# Altium PCB Reflow.PcbDoc
Units mm, origin at the board's own origin, x right, y up, seen from the top; angles counter-clockwise.
Board outline 100.73 x 61 mm, 2 copper layers (Top Layer, Bottom Layer), stack 1.569 mm thick; 44 components, 35 nets, 172 pads, 133 vias.
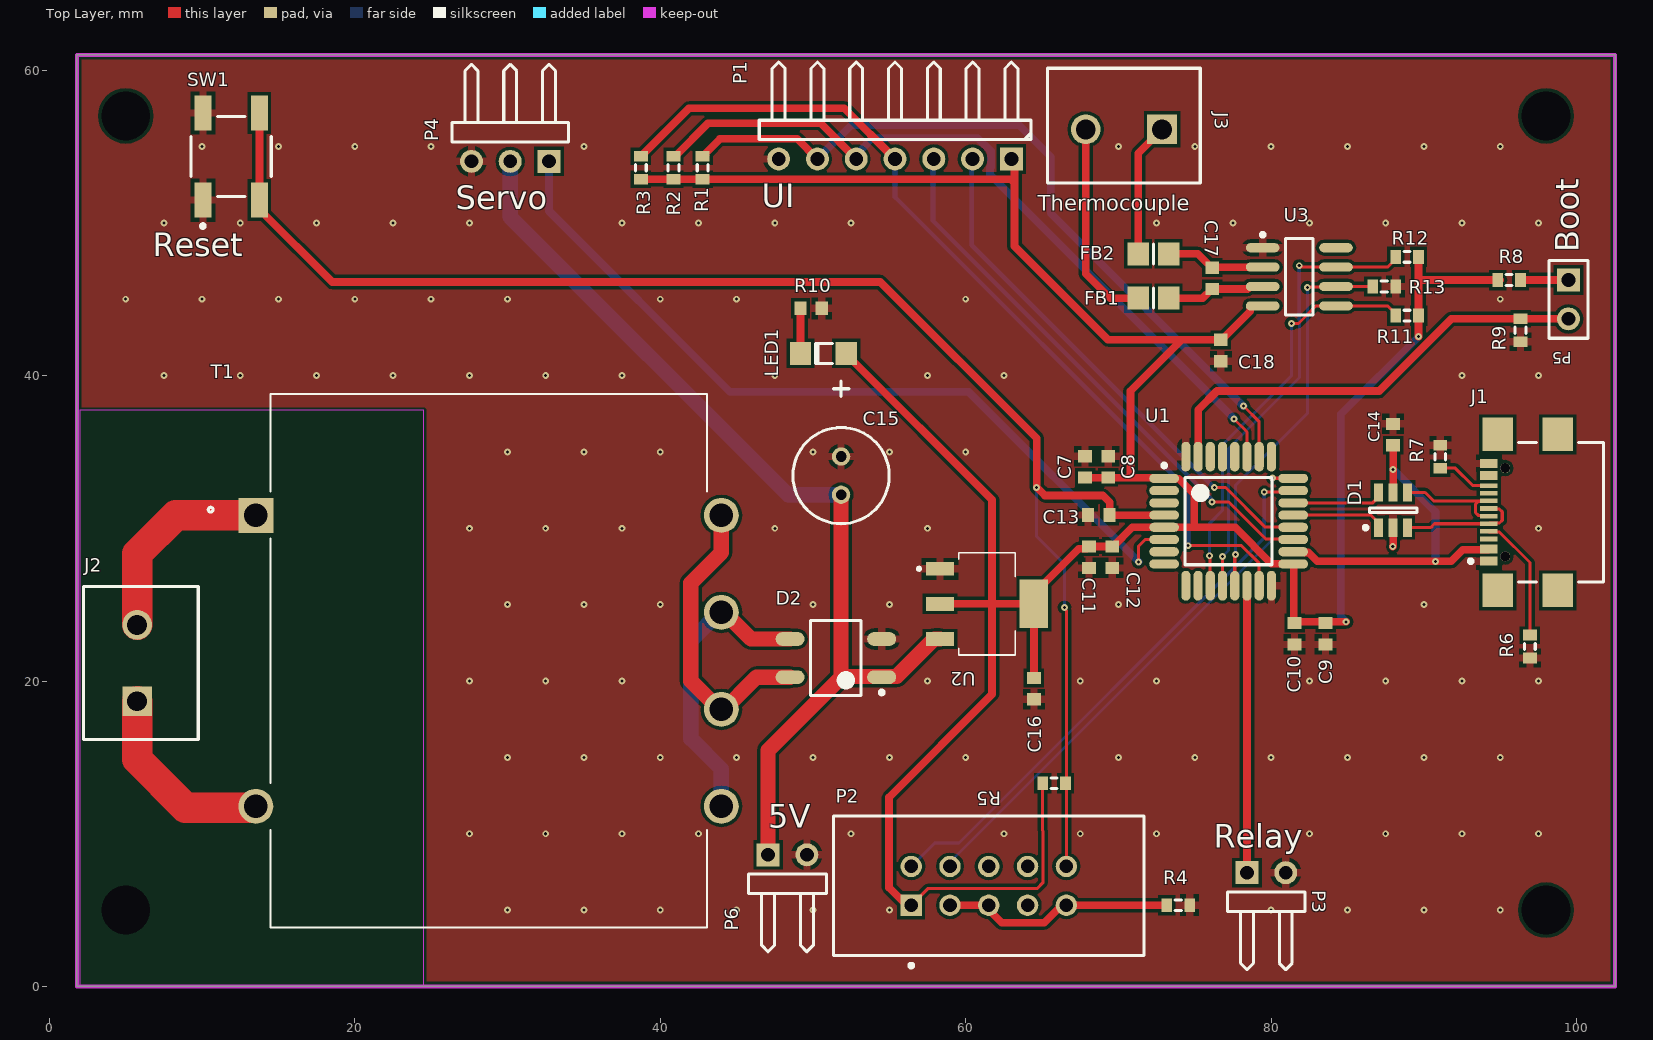
[diagram p0: Top Layer view]
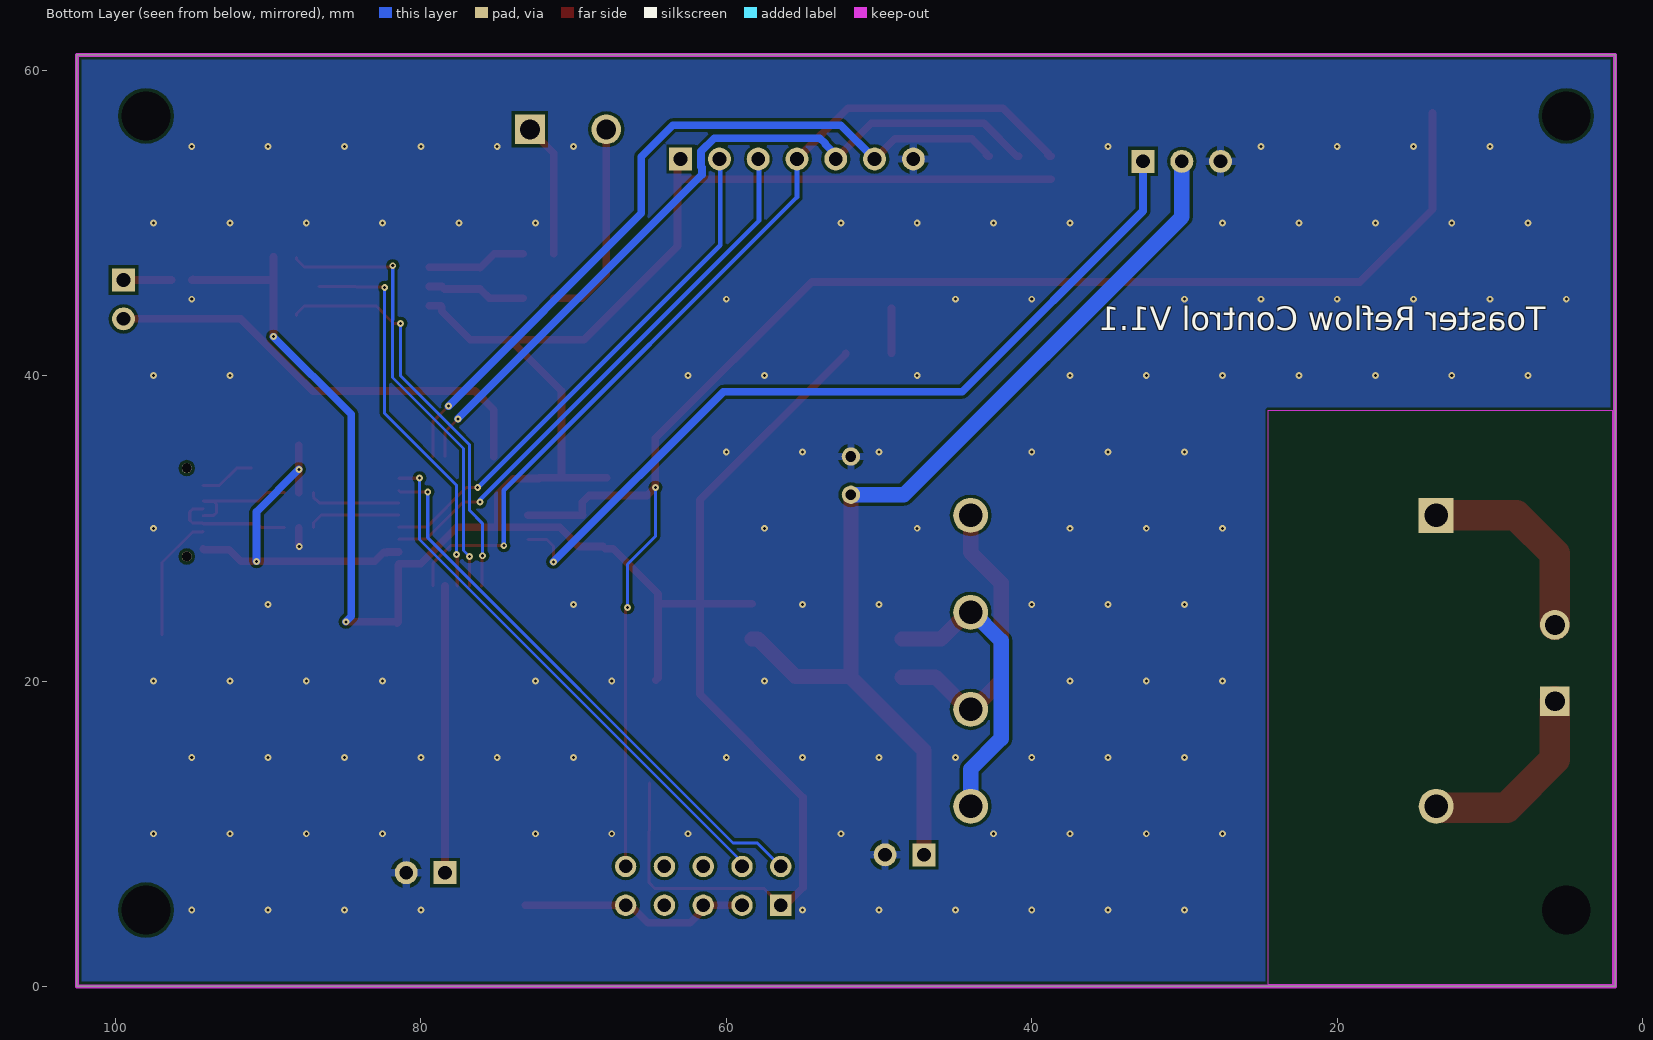
[diagram p1: Bottom Layer view, seen from below]

## Layer stack, top to bottom
Top Solder: solder mask 0.0254, SM-001, Dk 4
Top Layer: signal copper 0.035
Dielectric 1: core 1.4986, Core-043, Dk 4.3
Bottom Layer: signal copper 0.035
Bottom Solder: solder mask 0.0254, SM-001, Dk 4

## Board outline
1.8,0 1.8,61 102.525,61 102.525,0

## Design rules (kind name [scope] priority, off if disabled: settings)
BoardOutlineClearance [All] p1: gap=0.2 ignorepadtopadclearanceinfootprint=FALSE except(0.4: Arc-SplitBarrior Arc-SplitContinuation Track-SplitBarrior Track-SplitContinuation SMDPad-SplitBarrior SMDPad-SplitContinuation THPad-SplitBarrior THPad-SplitContinuation Via-SplitBarrior Via-SplitContinuation Fill-SplitBarrior Fill-SplitContinuation Poly-SplitBarrior Poly-SplitContinuation Region-SplitBarrior Region-SplitContinuation Text-SplitBarrior Text-SplitContinuation)
Clearance "Clearance Bottom Layer" [OnLayer('Bottom Layer')] p1: gap=0.203 ignorepadtopadclearanceinfootprint=TRUE except(0.254: Arc-Text Track-Text SMDPad-Text THPad-Text Via-Text Fill-Text Poly-Text Region-Text Text-Text)
Clearance "Clearance Top Layer" [OnLayer('Top Layer')] p2: gap=0.203 ignorepadtopadclearanceinfootprint=TRUE except(0.254: Arc-Text Track-Text SMDPad-Text THPad-Text Via-Text Fill-Text Poly-Text Region-Text Text-Text)
Clearance [All] p3: gap=0.2 ignorepadtopadclearanceinfootprint=FALSE except(0.089: Arc-Arc Arc-Track Arc-SMDPad Track-Track Track-SMDPad SMDPad-SMDPad; 0.127: Arc-Via Track-Via SMDPad-Via THPad-Via Via-Via; 0.254: Arc-Text Track-Text SMDPad-Text THPad-Text Via-Text Fill-Text Poly-Text Region-Text Text-Text)
HoleSize [All] p1: absolutevalues=TRUE maxlimit=6.3 minlimit=0.2 maxpercent=80.000 minpercent=20.000
MinimumAnnularRing [All] p1: minimumring=0.076
MinimumSolderMaskSliver [All] p1: minsoldermaskwidth=0.1
PolygonConnect PolygonConnect_1 [All] p1: thpad.connectstyle=Relief thpad.reliefconductorwidth=0.508 thpad.reliefentries=4 thpad.polygonreliefangle="90 Angle" thpad.airgapwidth=0.254 smdpad.connectstyle=Relief smdpad.reliefconductorwidth=0.508 smdpad.reliefentries=4 smdpad.polygonreliefangle="90 Angle" smdpad.airgapwidth=0.254 via.connectstyle=Direct via.reliefconductorwidth=0.508 via.reliefentries=4 via.polygonreliefangle="90 Angle" via.airgapwidth=0.254
RoutingCorners [All] p1: cornerstyle=Round minsetback=2.54 maxsetback=2.54
RoutingVias [All] p1: holewidth=0.5 width=0.7 viastyle="Through Hole" minholewidth=0.2 minwidth=0.45 maxholewidth=0.3 maxwidth=2
SilkToSilkClearance [All] p1: silktosilkclearance=0.1
SilkToSolderMaskClearance [IsPad] p1: minsilkscreentomaskgap=0.1 clearancetoexposedcopper=TRUE
SolderMaskExpansion [All] p1: expansion=0.102 istentingtop=FALSE
Width "Schematic Width Constraint_4" [InNet('NetJ2_2')] p1: maxlimit=2 minlimit=2 preferedwidth=2
Width "Schematic Width Constraint_3" [InNet('NetJ2_1')] p2: maxlimit=2 minlimit=2 preferedwidth=2
Width [All] p3: maxlimit=4 minlimit=0.2 preferedwidth=0.5
25 further rules are at their usual default settings.

## Classes and differential pairs
component class U_Thermocouple: C17 C18 FB1 FB2 J3 R11 R12 R13 U3
component class U_PowerSupply: C15 C16 D2 J2 LED1 P6 R10 T1 U2
component class U_Micro: C7 C8 C9 C10 C11 C12 C13 C14 D1 J1 P1 P2 P3 P4 P5 R1 R2 R3 R4 R5 R6 R7 R8 R9 SW1 U1

## Components (designator, comment, footprint, x,y, rotation, side; value= is the part's Value field where it differs from the comment)
C7 "Cap Semi" 1608[0603] 67.818,34.02 r270 top value=4.7uF (schematic designator C13)
C8 "Cap Semi" 1608[0603] 69.342,34.02 r270 top value=0.1uF (schematic designator C14)
C9 "Cap Semi" 1608[0603] 83.566,23.098 r90 top value=4.7uF (schematic designator C15)
C10 "Cap Semi" 1608[0603] 81.534,23.098 r90 top value=0.1uF (schematic designator C16)
C11 "Cap Semi" 1608[0603] 68.072,28.106 r90 top value=1uF (schematic designator C17)
C12 "Cap Semi" 1608[0603] 69.596,28.106 r90 top value=10nF (schematic designator C18)
C13 "Cap Semi" 1608[0603] 68.707,30.864 r0 top value=100nF (schematic designator C11)
C14 "Cap Semi" 1608[0603] 87.986,36.137 r270 top value=22uF (schematic designator C12)
C15 "Cap Pol3" 2.5mmCap 51.841,32.196 r90 top value=47uF (schematic designator C1)
C16 "Cap" 1608[0603] 64.469,19.5 r90 top value=1uF (schematic designator C3)
C17 "Cap" 1608[0603] 76.149,46.364 r270 top value=10nF (schematic designator C5)
C18 "Cap" 1608[0603] 76.708,41.64 r90 top value=0.1uF (schematic designator C4)
D1 "USBLC6-2SC6" STM-SOT23-6L_V 87.986,31.191 r90 top (schematic designator D2)
D2 "Bridge2" SOP250P700X300-4N 51.5,21.5 r180 top (schematic designator D1)
FB1 "BLM21AG102SN1D" 6-0805_M 72.288,45.069 r180 top
FB2 "BLM21AG102SN1D" 6-0805_M 72.288,47.965 r180 top
J1 "USB4110-GF-A" FP-USB4110-GF-A-MFG 97.934,31.047 r90 top (schematic designator J2)
J2 "Power" 691137710002 6,21.175 r90 top (schematic designator J3)
J3 "Thermocouple" 691137710002 70.358,56.372 r180 top (schematic designator J1)
LED1 "150120BS75000" 1206_A 50.681,41.453 r0 top
P1 "UI" HDR1X7H 62.992,54.178 r180 top (schematic designator P5)
P2 "5103308-1" TECO-5103308-1_V 61.511,6.588 r0 top (schematic designator P3)
P3 "Relay" HDR1X2H 78.416,7.45 r0 top (schematic designator P4)
P4 "Servo" HDR1X3H 32.715,54.026 r180 top (schematic designator P7)
P5 "Boot" HDR1X2 99.466,46.253 r270 top (schematic designator P2)
P6 "5V" HDR1X2H 47.062,8.62 r0 top (schematic designator P1)
R1 "Res3" J1-0603 42.774,53.607 r270 top value=1k (schematic designator R13)
R2 "Res3" J1-0603 40.869,53.607 r270 top value=1k (schematic designator R14)
R3 "Res3" J1-0603 38.735,53.607 r270 top value=1k (schematic designator R15)
R4 "Res3" J1-0603 73.914,5.318 r180 top value=10k (schematic designator R10)
R5 "Res3" J1-0603 65.786,13.31 r180 top value=10k (schematic designator R16)
R6 "Res3" J1-0603 96.943,22.259 r90 top value=1k (schematic designator R3)
R7 "Res3" J1-0603 91.076,34.687 r270 top value=1k (schematic designator R4)
R8 "Res3" J1-0603 95.579,46.253 r180 top value=1k (schematic designator R5)
R9 "Res3" J1-0603 96.329,42.963 r90 top value=10k
R10 "Res3" 1608[0603] 49.881,44.399 r180 top value=330 (schematic designator R12)
R11 "Res2" J1-0603 88.903,43.926 r0 top value=1K (schematic designator R1)
R12 "Res2" J1-0603 88.9,47.768 r0 top value=1K (schematic designator R11)
R13 "Res2" J1-0603 87.403,45.831 r180 top value=1K (schematic designator R2)
SW1 "Reset" CKCP-PTS525SM10SMTR-4_V 11.906,54.34 r90 top (schematic designator SW2)
T1 "F10-110-C2" XFMR_F10-110 28.762,21.32 r0 top (schematic designator T)
U1 "STM32F042K6T6" STM-LQFP32_M 77.216,30.464 r0 top (schematic designator U3)
U2 "AZ1117EH-3.3TRG1" SOT230P700X180-4N 61.394,25.05 r0 top (schematic designator U1)
U3 "MAX31855KASA+T" MAXM-S8+4_N 81.845,46.466 r0 top (schematic designator U2)

## Footprints (in the part's own frame and the unit in brackets; to place one, negate y for a bottom-side part, rotate by r counter-clockwise, add the part's x,y. Pads: shape width x height; smd on the part's side, far side on the other; paste and mask are expansions set on the pad)
2.5mmCap [mm]
  round 1.2 hole 0.7: 1(0,0) 2(2.5,0)
  silkscreen extent -1.9,-3.15 7.45,3.15
6-0805_M [mm] "Chip Resistor, Body 2.0x1.2mm, IPC Low Density"
  rect 1.4x1.5 smd: 1(-1,0) 2(1,0)
  silkscreen extent 0,-0.65 0,0.65, body extent -1.07,-0.7 1.07,0.7, height 0.7
1206_A [mm] "Chip LED, 2-Leads, Body 3.2x1.6mm, IPC Medium Density"
  rect 1.4x1.5 smd: 1(-1.5,0) 2(1.5,0)
  silkscreen extent -0.5,-0.66 0.6,0.65, body extent -1.6,-0.8 1.6,0.8, height 0.68
1608[0603] [mm] "Chip Capacitor, Body 1.6x0.8mm, IPC High Density"
  rect 0.8x0.9 smd: 1(-0.7,0) 2(0.7,0)
  body extent -0.87,-0.48 0.87,0.48, height 1.3
691137710002 [mm] "Horizontal Cable Entry with Pressure Clamp, pitch 5mm, 02p"
  rect 1.95x1.95 hole 1.3: 1(-2.5,0.25)
  round 1.95 hole 1.3: 2(2.5,0.25)
  silkscreen extent -5,-3.75 5,3.75, body extent -5,-3.75 5,3.75, height 11.6
CKCP-PTS525SM10SMTR-4_V [mm] "SMD, 4-Leads, Body 5.25x5.25mm"
  rect 2.3x1.1 smd: 1(-2.85,1.85) 2(2.85,1.85) 3(-2.85,-1.85) 4(2.85,-1.85)
  silkscreen extent -4.67,-2.63 2.63,2.63, body extent -2.68,-2.68 2.68,2.68, height 1.5
FP-USB4110-GF-A-MFG [mm]
  rect 2.18x2 smd paste+0 mask+0: 1(-5.11,3.105) 2(5.11,3.105) 3(-5.11,-0.825) 4(5.11,-0.825)
  rect 0.6x1.15 smd paste+0 mask+0: A1-B12(-3.2,3.68) A4-B9(-2.4,3.68) B1-A12(3.2,3.68) B4-A9(2.4,3.68)
  rect 0.3x1.15 smd paste+0 mask+0: A5(-1.25,3.68) A6(-0.25,3.68) A7(0.25,3.68) A8(1.25,3.68) B5(1.75,3.68) B6(0.75,3.68) B7(-0.75,3.68) B8(-1.75,3.68)
  round 0.65 hole 0.65 unplated paste-1000 mask+0: ""(-2.89,2.605) ""(2.89,2.605)
  silkscreen extent -4.57,-3.83 4.57,4.99, body extent -6.3,-3.92 6.3,4.36, height 0.25
HDR1X2 [mm] "Connector; Header; 2 Position"
  rect 1.5x1.5 hole 0.9: 1(0,0)
  round 1.5 hole 0.9: 2(2.54,0)
  silkscreen extent -1.27,-1.27 3.81,1.27
HDR1X2H [mm] "Connector; Header; 2 Position; Right Angle"
  rect 1.5x1.5 hole 0.9: 1(0,0)
  round 1.5 hole 0.9: 2(2.54,0)
  silkscreen extent -1.27,-6.35 3.81,-1.27
HDR1X3H [mm] "Connector; Header; 3 Position; Right Angle"
  rect 1.5x1.5 hole 0.9: 1(0,0)
  round 1.5 hole 0.9: 2(2.54,0) 3(5.08,0)
  silkscreen extent -1.27,-6.35 6.35,-1.27
HDR1X7H [mm] "Connector; Header; 7 Position; Right Angle"
  rect 1.5x1.5 hole 0.9: 1(0,0)
  round 1.5 hole 0.9: 2(2.54,0) 3(5.08,0) 4(7.62,0) 5(10.16,0) 6(12.7,0) 7(15.24,0)
  silkscreen extent -1.27,-6.35 16.51,-1.27
J1-0603 [mm] "Chip Resistor, Body 1.6x0.8mm, IPC High Density"
  rect 0.7x0.9 smd: 1(-0.75,0) 2(0.75,0)
  silkscreen extent -0.2,-0.35 0.2,0.35, body extent -0.85,-0.48 0.85,0.48, height 0.9
MAXM-S8+4_N [mm] "SOIC, 8-Leads, Body 4.9x3.9mm, Pitch 1.27mm, IPC Medium Density"
  oval 2.2x0.6 smd: 1(-2.4,1.905) 2(-2.4,0.635) 3(-2.4,-0.635) 4(-2.4,-1.905) 5(2.4,-1.905) 6(2.4,-0.635) 7(2.4,0.635) 8(2.4,1.905)
  silkscreen extent -2.52,-2.5 0.9,2.88, body extent -2,-2.5 2,2.5, height 1.75
SOP250P700X300-4N [mm] "SOP, 4-Leads, Body 4.70x3.80mm, Pitch 2.50mm, IPC Medium Density"
  oval 1.9x0.9 smd: 1(-3,1.25) 2(-3,-1.25) 3(3,-1.25) 4(3,1.25)
  silkscreen extent -3.13,-2.45 1.65,2.45, body extent -2,-2.45 2,2.45, height 3
SOT230P700X180-4N [mm]
  rect 1.86x0.9 smd: 1(-3.075,2.3) 2(-3.075,0) 3(-3.075,-2.3)
  rect 1.86x3.19 smd: 4(3.075,0)
  silkscreen extent -4.55,-3.35 1.85,3.35
STM-LQFP32_M [mm] "QFP, 32-Leads, Body 7x7mm, Pitch 0.8mm, IPC Low Density"
  oval 1.95x0.6 smd: 1(-4.225,2.8) 2(-4.225,2) 3(-4.225,1.2) 4(-4.225,0.4) 5(-4.225,-0.4) 6(-4.225,-1.2) 7(-4.225,-2) 8(-4.225,-2.8) 17(4.225,-2.8) 18(4.225,-2) 19(4.225,-1.2) 20(4.225,-0.4) 21(4.225,0.4) 22(4.225,1.2) 23(4.225,2) 24(4.225,2.8)
  oval 0.6x1.95 smd: 9(-2.8,-4.225) 10(-2,-4.225) 11(-1.2,-4.225) 12(-0.4,-4.225) 13(0.4,-4.225) 14(1.2,-4.225) 15(2,-4.225) 16(2.8,-4.225) 25(2.8,4.225) 26(2,4.225) 27(1.2,4.225) 28(0.4,4.225) 29(-0.4,4.225) 30(-1.2,4.225) 31(-2,4.225) 32(-2.8,4.225)
  silkscreen extent -4.35,-2.85 2.85,3.77, body extent -3.5,-3.5 3.5,3.5, height 1.6
STM-SOT23-6L_V [mm] "SOT23, 6-Leads, Body 3.05x1.75mm, Pitch 0.95mm"
  rect 1.2x0.6 smd: 1(-1.15,0.95) 2(-1.15,0) 3(-1.15,-0.95) 4(1.15,-0.95) 5(1.15,0) 6(1.15,0.95)
  silkscreen extent -1.27,-1.55 0.15,1.92, body extent -1.6,-1.53 1.6,1.53, height 1.45
TECO-5103308-1_V [mm] "Connector, 10-Leads, Body 20.32x9.14mm, Pitch 2.54mm"
  rect 1.4x1.4 hole 0.89: 1(-5.08,-1.27)
  round 1.4 hole 0.89: 2(-5.08,1.27) 3(-2.54,-1.27) 4(-2.54,1.27) 5(0,-1.27) 6(0,1.27) 7(2.54,-1.27) 8(2.54,1.27) 9(5.08,-1.27) 10(5.08,1.27)
  silkscreen extent -10.16,-5.34 10.16,4.57, body extent -10.16,-4.57 10.16,4.57, height 9.86
XFMR_F10-110 [mil]
  rect 90x90 hole 60: 1(-600,375)
  round 90 hole 60: 4(-600,-375) 5(600,375) 6(600,125) 7(600,-125) 8(600,-375)
  silkscreen extent -723,-688 562,688

## Part data
C7 C9 C11: library part "Cap Semi_1", "Capacitor (Semiconductor SIM Model)", LCSC Part #=C15849, LatestRevisionDate=29-May-2009, LatestRevisionNote="IPC-7351 Footprint Added.", PackageDescription="Chip Capacitor", PackageReference=C1206, Published=8-Jun-2000, Publisher="Altium Limited"
C8 C10 C12: library part "Cap Semi_2", "Capacitor (Semiconductor SIM Model)", LCSC Part #=C15195, LatestRevisionDate=29-May-2009, LatestRevisionNote="IPC-7351 Footprint Added.", PackageDescription="Chip Capacitor", PackageReference=C1206, Published=8-Jun-2000, Publisher="Altium Limited"
C13 C14: library part "Cap Semi_3", "Capacitor (Semiconductor SIM Model)", LCSC Part #=C14663, LatestRevisionDate=29-May-2009, LatestRevisionNote="IPC-7351 Footprint Added.", PackageDescription="Chip Capacitor", PackageReference=C1206, Published=8-Jun-2000, Publisher="Altium Limited"
C15: "Polarized Capacitor (Surface Mount)", LatestRevisionDate=29-May-2009, LatestRevisionNote="IPC-7351 Footprint Added.", PackageDescription="Chip Capacitor", PackageReference=C0805, Published=8-Jun-2000, Publisher="Altium Limited"
C16 C17 C18: "Capacitor", LatestRevisionDate=17-Jul-2002, LatestRevisionNote="Re-released for DXP Platform.", PackageDescription="Radial Cap, Thru-Hole; 2 Leads; 0.3 in Pin Spacing", PackageReference=RAD-0.3, Published=8-Jun-2000, Publisher="Altium Limited"
D1: library part CMP-2000-05378-1, "Very low capacitance ESD protection, 3.5 pF, -40 to 125 degC, 6-Pin SOT23, RoHS, Tape and Reel", Capacitance Value=3.5pF, Clamping Voltage=17V, Leakage Current=0.15uA, Manufacturer=STMicroelectronics, Operating Temp Range=-40Cto125C, Operating Temperature Classification=Automotive, Operating Temperature Max Deg. C=125C, Operating Temperature Min Deg. C=-40C, Package / Case=SOT-23, Package Description="6-Pin Small Outline Transistor, Body 2.925 x 1.625 mm, Pitch 0.95 mm", Package Reference=SOT23-6L, Peak Pulse Current=5A, Reverse Breakdown Voltage=6V, Reverse Stand-off Voltage=5V, Test Current (It)=1mA, Clamping Voltage (Max)=17V, Configuration=Dual, Datasheet URL=http://www.st.com/st-web-ui/static/active/en/resource/technical/document/datasheet/CD00050750.pdf, Datasheet Version="Rev. 5, 10/2011", Direction Type=Uni-Directional, Leakage Current (Max)=0.15uA, Manufacturer URL=http://www.st.com/, Mounting=SurfaceMount, Mounting Style=SurfaceMount, Number of Elements=1, Packaging=TapeandReel, Pin Count=6, Polarity=Uni-Directional, Product Depth (mm)=1.75mm, Product Height (mm)=1.3mm, Product Length (mm)=3.05mm, Rad Hardened=No, Suppressor Type=DiodeArrays, Working Voltage=5V, Working Voltage (Max)=5V
D2: "Diode Bridge", LatestRevisionDate=17-Jul-2002, LatestRevisionNote="Re-released for DXP Platform.", PackageDescription="Bridge Rectifier; 4 Terminals; Body 16.8 x 16.8 mm (typ); Pitch 10.67 mm", PackageReference=D-46_6A, Published=24-Mar-1999, Publisher="Altium Limited"
FB1 FB2: library part MURA-FB-2, "Chip Ferrite Bead for General Signal lines, 1000 Ohm, 500 mA, -55 to 125 degC, 2 x 1.25 x 1.05 mm SMD, Tape and Reel", DC Resistance="0.28 Ohm Max.", LCSC Part #=C1015, Manufacturer=Murata, Operating Temperature Range="-55 to 125 degC", Rated Current="500 mA", ComponentLink1Description="Manufacturer URL", ComponentLink1URL=http://www.murata.com/, ComponentLink2Description=Datasheet, ComponentLink2URL=http://www.murata.com/products/catalog/pdf/c31e.pdf, ComponentLink3Description="Package Specification", ComponentLink3URL=http://www.murata.com/products/catalog/pdf/c31e.pdf, DatasheetVersion=08/2013, Impedance (at 100 MHz)="1000 Ohm +/- 25%", Mounting Technology="Surface Mount", PackageDescription="2-Pin Chip, Body 2 x 1.25 mm", PackageReference=BLM21_H1050-2, Packing="Tape and Reel", PartNumber=BLM21AG102SN1D
J1: library part CMP-245163-000002-1, "CONN USB 2.0 TYPE-C R/A SMT", Current Rating=3/4.25/1.25/0.25A, Manufacturer=GCT, Package=0, Temperature="-40°C to +85°C", Temperature Range High=+85°C, Temperature Range Low=-40°C, Voltage Rating=20V, Automotive=No, Category=Conn, ComponentLink2Description=Datasheet, ComponentLink2URL=https://gct.co/files/drawings/usb4110.pdf, Conn Orientation="Right Angle", Contact Material=Gold,Nickel, Device Class L1=Connectors, Device Class L2="USB Connectors", Device Class L3=unset, Digikey Description="CONN USB 2.0 TYPE-C R/A SMT", Height=3.46mm, Is Female=yes, Lead Free=Yes, Manufacturer Part Number=USB4110-GF-A, Number Of Contacts=16, Octopart=https://octopart.com/usb4110-gf-a-gct-103941985, RoHS=TRUE, Shielding=true, Standoff Height=0.1mm, Usb Standard="USB 2.0"
J2 J3: library part CMP-1502-03324-1, "Series 1377 - 5.00 mm Horizontal Entry with Pressure Clamp WR-TBL, 2 pin", Manufacturer="Wurth Elektronik", Operating Temperature=-30to120degC, Package Reference=691137710002, Datasheet URL=http://katalog.we-online.de/pbs/datasheet/691137710002.pdf, Manufacturer URL=http://www.we-online.de, Mounting Technology=THT, Packaging=Box, Part Number=691137710002, Pin Number=2, Pitch=5.00mm, Publisher=WurthElektronik
LED1: library part CMP-1426-00015-1, "SMD mono-color Chip LED, WL-SMCW, Blue", Color=Blue, Manufacturer="Wuerth Elektronik", ComponentLink1Description="Manufacturer URL", ComponentLink1URL=http://www.we-online.com, ComponentLink2Description=Datasheet, ComponentLink2URL=http://katalog.we-online.com/led/datasheet/150120BS75000.pdf, PackageReference=1206_A, PartNumber=150120BS75000
P1: library part "Header 7H", "Header, 7-Pin, Right Angle", LatestRevisionDate=17-Jul-2002, LatestRevisionNote="Re-released for DXP Platform.", Publisher="Altium Limited"
P2: library part CMP-2000-05416-1, "Male Header, Pitch 2.54 mm, 2 x 5 Position, Height 9.85 mm, Tail Length 3.05 mm, RoHS, Tube", Color=Black, Manufacturer="TE Connectivity", Standard Package=125, 3D Model=5103308-1.pdf, Catalog Drawings=LowProfileShroudedStraight, Category=Connectors,Interconnects, Connector Type=Header,Shrouded, Contact Finish=GoldorGold-Palladium, Contact Finish Thickness=15µin(0.38µm), Contact Mating Length="0.240\"(6.10mm)", Contact Type=MalePin, Datasheet URL=http://www.onlinecomponents.com/productFiles/mf-AMP/eng_cat_889409_0699_96_.pdf, Datasheet Version=Apr-12, Dynamic Catalog=AMP-LatchSeries, Family=RectangularConnectors-Headers,MalePins, Featured Product=AMP-LATCHRibbonCableConnectors, Manufacturer URL=http://www.te.com/, Mating Products="1658624-1-ND / -CONNRCPT10POSPOLARGOLD / 1658527-4-ND / -CONNRCPT10POS.100W/STRRELF / 1658527-3-ND / -CONNRCPT10POS.100622SERIES / 1658526-3-ND / -CONNRCPT10POSVERTGOLD / 1658526-5-ND / -609-1041LFFEMSOCKT,LEADFREE / 1658526-4-ND / -609-1030LFFEMSOCKT,LEADFREE / ASC10B-ND / -CONNIDCSOCKET10POSGOLD / ASC10H-ND / -CONNIDCSOCKET10POS15GOLD / AKC10B-ND / -CONNIDCSKT10POSW/POLGOLD / AKC10H-ND / -CONNIDCSKT10POSW/POL15GOLD / More...", Mounting Type=ThroughHole, Number of Positions=10, Number of Positions Loaded=All, Number of Rows=2, Other Names=A33159, Packaging=Tube, Pitch="0.100\"(2.54mm)", RoHS Information=5103308-1StatementofCompliance, Row Spacing="0.100\"(2.54mm)", Series=AMP-Latch, Termination=Solder
P3 P6: library part "Header 2H", "Header, 2-Pin, Right Angle", LatestRevisionDate=17-Jul-2002, LatestRevisionNote="Re-released for DXP Platform.", Publisher="Altium Limited"
P4: library part "Header 3H", "Header, 3-Pin, Right Angle", LatestRevisionDate=17-Jul-2002, LatestRevisionNote="Re-released for DXP Platform.", Publisher="Altium Limited"
P5: library part "Header 2", "Header, 2-Pin", LatestRevisionDate=17-Jul-2002, LatestRevisionNote="Re-released for DXP Platform.", Publisher="Altium Limited"
R1 R2 R3 R4 R5 R6 R7 R8 R9 R10: library part Res3_2, "Resistor", LCSC Part #=C25804, LatestRevisionDate=29-May-2009, LatestRevisionNote="IPC-7351 Footprint Added.", PackageDescription="Chip Resistor", PackageReference=J1-0603, Published=8-Jun-2000, Publisher="Altium Limited"
R11 R12 R13: "Resistor", LatestRevisionDate=17-Jul-2002, LatestRevisionNote="Re-released for DXP Platform.", PackageDescription="Axial Device, Thru-Hole; 2 Leads; 0.4 in Pin Spacing", PackageReference=AXIAL-0.4, Published=8-Jun-2000, Publisher="Altium Limited"
SW1: library part CMP-2000-05088-1, "Microminiature Tact Switch, SPST-NO, 50 mA, 12 VDC, -40 to 60 degC, 4-Pin SMD, RoHS, Tape and Reel", Actuator Color=N/A, Contact Rating @ Voltage=0.05@12VDCA, Dielectric Strength=250VAC, Manufacturer="C&K Components", Maximum Contact Resistance=100mOhm, Maximum DC Voltage Rating=12V, Minimum Insulation Resistance=100000MOhm, Operating Force=1.57N, Operating Temperature=-40to60C, Part No=PTS525SM10SMTRLFS, Actuator Length=0.3mm, Actuator Style=RoundButton, Base Material=Nylon6/6,Glass/Polyester, Body Orientation=Straight, Contact Material=PhosphorBronze, Contact Plating=SilverClad, Datasheet URL=https://datasheet.ciiva.com/18145/getdatasheetpartid-226915-18145102.pdf, Datasheet Version=Apr-09, Dimension=5.25x6.4x1.5mm, ECCN=EAR99, Electrical Life=N/A, Family=PTS525, Ground Terminal=No, Housing Material=N/A, HTS=8536501199, Illumination Type=N/R, Manufacturer URL=http://www.ckswitches.com/, Maximum AC Voltage Rating=N/A, Mechanical Life=100000Cycles, Mounting=SurfaceMount,GullWing, Packaging=TapeandReel, Pole Throw Configuration=SPST, Product Weight=N/A, RoHS=Yes, Seal Description=N/A, Seal Location=N/A, Supplier=C&KComponents, Supplier Standard Pack=3,000, Switch Configuration=N.O., Type=N/A
T1: "F10 Series Single Primary Dual Secondary Split Bobbin Class 2 Transformer", Package="Triad Magnetics", Digi-Key_Part_Number=237-1557-ND, Digi-Key_Purchase_URL=https://www.digikey.in/product-detail/en/triad-magnetics/F10-110-C2/237-1557-ND/3986429?utm_source=snapeda&utm_medium=aggregator&utm_campaign=symbol, MF="Triad Magnetics", MP=F10-110-C2, SnapEDA_Link=https://www.snapeda.com/parts/F10-110-C2/Triad%20Magnetics/view-part/2768214/?ref=snap
U1: library part CMP-0304-00114-2, "ARM Cortex-M0 32-bit MCU, 32 KB Flash, 6 KB Internal RAM, 28 I/Os, 32-Pin LQFP, -40 to 85 degC, Tray", I/Os (High Current)=28, Manufacturer=STMicroelectronics, Operating Frequency(F) (Processor speed) (MHz)=48, Package Description="32-Pin Low Profile Quad Flat Package, 7 x 7 mm Body, 0.8 mm Pitch", Package Reference=LQFP32, Supply Voltage(Vcc) min (V)=2, ComponentLink1Description="Manufacturer URL", ComponentLink1URL=http://www.st.com/, ComponentLink2Description=Datasheet, ComponentLink2URL=http://www.st.com/st-web-ui/static/active/en/resource/technical/document/datasheet/DM00105814.pdf, Core="ARM Cortex-M0", DatasheetVersion="Rev. 5", FLASH Size (Prog) (kB)=32, Internal RAM Size (kB)=6, Mounting Technology="Surface Mount", Packing=Tray, PartNumber=STM32F042K6T6
U2: "Linear Voltage Regulator IC 1 Output 1A SOT-223", Package="SOT-223 Diodes Inc.", Availability=Unavailable, MF="Diodes Inc.", MP=AZ1117EH-3.3TRG1, Price=None, SnapEDA_Link=https://www.snapeda.com/parts/AZ1117EH-3.3TRG1/Diodes%20Inc./view-part/482930/?ref=snap
U3: library part CMP-0253-00398-1, "Cold Junction Compensated Thermocouple to Digital Converter, 14 Bits Temperature Resolution, -40 to 125 degC, 8-Pin SOIC (S8+4), Pb-Free, Tape ang Reel", Generic Part Number=MAX31855, Code_JEDEC=MS-012, ComponentLink1Description="Manufacturer URL", ComponentLink1URL=http://www.maximintegrated.com/, ComponentLink2Description=Datasheet, ComponentLink2URL=http://datasheets.maximintegrated.com/en/ds/MAX31855.pdf, ComponentLink3Description="Package Specification", ComponentLink3URL=http://pdfserv.maximintegrated.com/package_dwgs/21-0041.PDF, DatasheetVersion="Rev. 2", Functions="Thermocouple-to-Digital Converter", Interface=SPI, Mounting Technology="Surface Mount", PackageDescription="8-Pin Small-Outline IC, Narrow, Body 3.9 x 4.9 mm, Pitch 1.27 mm", PackageReference=S8+4, PackageVersion="Rev. D, 10/2012", Packing="Tape ang Reel", Parasite Pwr.=No, PartNumber=MAX31855KASA+T

## Free pads (board coordinates)
  round 1.524 hole 3.2 unplated: 2(5,57) 3(5,5)
  round 1.524 hole 3.2: 5(98,57) 6(98,5)

## Via types
v1: diameter 0.45, hole 0.2, Top Layer to Bottom Layer, 133 vias

## Nets (pads, with @x,y where several pads share a name; then routed paths per layer and width w, separated by ;. In a path a pad name is that pad's centre, name@x,y a point inside that pad or via, vN(x,y) a via of type N, cw(c..) or ccw(c..) an arc to the next point about the centre after c; other vN are vias at no path point)
+3.3: C7.2 C8.2 C9.2 C10.2 C11.2 C12.2 C16.2 C18.2 LED1.2 P1.1 P2.1 R1.2 R2.2 R3.2 R5.2 R8.2 R11.2 R12.2 U1.1 U1.5 U1.17 U2.2 U2.4 U3.4 | length 199.9
  Top Layer w0.2: P2.1 57.514,6.401 64.668,6.401 65.054,6.786 65.054,10.192 65.036,10.21 R5.2
  Top Layer w0.5: R3.2 R2.2 R1.2 62.967,52.857 63.195,52.629 ; LED1.2 52.181,41.403 61.722,31.863 61.722,25.05 ; P2.1@56.134,5.318 54.981,6.471 54.981,12.39 61.722,19.131 61.722,25.05 ; U2.2 61.722,25.05 ; P1.1 63.195,53.975 63.195,52.629 ; C16.2 C16.2@64.619,20.05 ; C16.2@64.469,20.25 U2.4@64.469,25.05 ; C7.2 C8.2 70.787,33.32 ; U3.4 78.672,44.561 78.626,44.515 78.626,44.208 76.758,42.34 C18.2 74.143,42.34 ; v1(84.912,23.876) 81.629,23.876 81.543,23.789 C10.2 81.487,23.845 81.487,27.618 81.441,27.664 81.422,27.683 80.017,27.683 77.636,30.064 75.032,30.064 ; v1(89.65,42.55) 89.65,46.177 ; R12.2 89.65,46.177 ; R8.2 89.726,46.253 89.65,46.177 ; R8.2@94.939,46.297 R8.2@94.983,46.253 ; 61.722,25.05 U2.4 ; 63.195,52.629 63.195,48.463 69.318,42.34 74.143,42.34 ; U2.4 64.469,25.715 67.41,28.656 67.922,28.656 C11.2 69.646,28.806 70.904,30.064 U1.5 75.032,30.064 ; 70.787,33.32 72.233,33.32 72.289,33.264 U1.1 73.01,33.245 73.95,33.245 74.963,32.232 74.963,30.133 75.032,30.064 ; 70.787,33.32 70.787,38.985 74.143,42.34
  Bottom Layer w0.5: v1(84.912,23.876) 84.557,24.232 84.557,37.457 v1(89.65,42.55)
+5: C15.1 D2.1 P4.2 P6.1 U2.3 | length 65.9
  Top Layer w1: P6.1 47.062,15.464 51.892,20.295 ; C15.1 51.841,20.345 51.892,20.295 ; U2.3 57.939,22.75 55.484,20.295 51.892,20.295
  Bottom Layer w1: P4.2 30.175,50.394 48.372,32.196 C15.1
B1: P1.4 R3.1 U1.15 | length 59.2
  Top Layer w0.2: v1(74.568,28.86) 78.058,28.86 79.216,27.702 U1.15
  Top Layer w0.5: R3.1 38.835,54.357 38.935,54.457 38.935,54.557 41.883,57.506 52.045,57.506 P1.4
  Bottom Layer w0.3: P1.4 55.372,51.689 74.568,32.493 v1(74.568,28.86)
B2: P1.5 R2.1 U1.27 | length 50.8
  Top Layer w0.2: v1(77.572,37.16) 78.416,36.316 U1.27
  Top Layer w0.5: R2.1 40.969,54.357 43.126,56.515 50.495,56.515 P1.5
  Bottom Layer w0.5: P1.5 52.832,54.449 53.52,55.137 53.52,55.196 53.873,55.55 60.782,55.55 61.655,54.677 61.655,53.68 61.595,53.62 61.595,53.137 v1(77.572,37.16)
B3: P1.6 R1.1 U1.26 | length 50.9
  Top Layer w0.2: v1(78.188,38.002) 79.216,36.974 U1.26
  Top Layer w0.5: R1.1 42.874,54.357 42.974,54.457 42.974,54.557 43.915,55.499 48.971,55.499 P1.6
  Bottom Layer w0.5: P1.6 52.502,56.388 63.5,56.388 65.557,54.331 65.557,50.633 v1(78.188,38.002)
BOOT0: P5.2 R9.2 U1.31 | length 29.8
  Top Layer w0.5: U1.31 75.216,37.751 76.454,38.989 87.083,38.989 91.808,43.713 R9.2 P5.2
CS: R13.2 U1.13 U3.6 | length 25.9
  Top Layer w0.2: U1.13 77.616,28.318 77.608,28.326 77.635,28.326 v1(77.668,28.292) ; v1(82.367,45.771) 82.397,45.801 84.215,45.801 U3.6 R13.2
  Bottom Layer w0.2: v1(77.668,28.292) 77.668,32.821 82.367,37.52 v1(82.367,45.771)
GND: C7.1 C8.1 C9.1 C10.1 C11.1 C12.1 C13.1 C14.1 C15.2 C16.1 C18.1 D1.2 D2.2 J1.A1-B12 J1.B1-A12 P1.7 P3.2 P4.3 P6.2 R4.1 R6.1 R7.1 R9.1 R10.1 R13.1 SW1.1 SW1.2 U1.16 U1.32 U2.1 U3.1 | length 1.2
  Top Layer w0.5: v1(87.96,28.804) 87.986,28.829 D1.2
  other v1: 30,5 35,5 40,5 45,5 50,5 55,5 80,5 85,5 90,5 95,5 27.5,10 32.5,10 37.5,10 42.5,10 52.5,10 62.5,10 67.5,10 72.5,10 82.5,10 87.5,10 92.5,10 97.5,10 30,15 35,15 40,15 45,15 50,15 55,15 60,15 70,15 75,15 80,15 85,15 90,15 95,15 27.5,20 32.5,20 37.5,20 57.5,20 67.5,20 72.5,20 82.5,20 87.5,20 92.5,20 97.5,20 30,25 35,25 40,25 50,25 55,25 70,25 90,25 27.5,30 32.5,30 37.5,30 47.5,30 57.5,30 97.5,30 30,35 35,35 40,35 50,35 55,35 60,35 7.5,40 12.5,40 17.5,40 22.5,40 27.5,40 32.5,40 37.5,40 47.5,40 57.5,40 62.5,40 92.5,40 97.5,40 5,45 10,45 15,45 20,45 25,45 30,45 40,45 45,45 60,45 95,45 7.5,50 12.5,50 17.5,50 22.5,50 27.5,50 37.5,50 42.5,50 47.5,50 52.5,50 72.5,50 77.5,50 82.5,50 87.5,50 92.5,50 97.5,50 10,55 15,55 20,55 25,55 35,55 70,55 75,55 80,55 85,55 90,55 95,55
MISO: R12.1 U1.12 U3.7 | length 29.7
  Top Layer w0.2: v1(76.81,28.153) 76.813,28.149 76.813,26.242 U1.12 ; v1(81.839,47.193) 81.931,47.101 U3.7 87.615,47.101 88.15,47.636 R12.1@88.15,47.736
  Bottom Layer w0.2: v1(76.81,28.153) 77.208,28.551 77.208,35.221 81.859,39.873 81.859,43.627 81.839,43.648 v1(81.839,47.193)
NetC17_1: C17.1 FB2.1 U3.2 | length 6.5
  Top Layer w0.5: FB2.1 75.199,47.965 76.099,47.064 C17.1 76.168,47.083 79.427,47.083 U3.2
NetC17_2: C17.2 FB1.1 U3.3 | length 6.5
  Top Layer w0.5: FB1.1 75.504,45.069 76.099,45.664 C17.2 78.452,45.664 78.618,45.831 U3.3
NetD2_2: D2.3 T1.6 T1.8 | length 20.4
  Top Layer w1: T1.6@44.002,24.686 45.938,22.75 D2.3
  Bottom Layer w1: T1.8@44.002,11.224 44.002,14.222 42,16.225 42,22.638 44.002,24.64 T1.6@44.002,24.686
NetD2_4: D2.4 T1.5 T1.7 | length 20.6
  Top Layer w1: T1.5@44.002,31.417 44.002,28.418 42,26.415 42,20.002 44.002,18 44.002,17.955 46.298,20.25 D2.4
NetFB1_2: FB1.2 J3.2 | length 13.5
  Top Layer w0.5: J3.2 67.858,46.68 69.469,45.069 FB1.2
NetFB2_2: FB2.2 J3.1 | length 8.8
  Top Layer w0.5: FB2.2 71.288,54.552 J3.1
NetJ1_A5: J1.A5 R6.2 | length 8.3
  Top Layer w0.2: J1.A5 94.301,29.75 94.955,29.75 96.943,27.761 R6.2
NetJ1_B5: J1.B5 R7.2 | length 3.7
  Top Layer w0.2: R7.2 92.056,33.937 93.196,32.797 J1.B5
NetJ2_1: J2.1 T1.4 | length 12.9
  Top Layer w2: J2.1 5.75,14.875 8.916,11.709 13.235,11.709 13.265,11.74 13.468,11.74 T1.4
NetJ2_2: J2.2 T1.1 | length 13.5
  Top Layer w2: J2.2 5.75,28.325 8.286,30.861 13.506,30.861 T1.1
NetLED1_1: LED1.1 R10.2 | length 2.9
  Top Layer w0.5: LED1.1 R10.2
NetP2_3: P2.3 P2.5 P2.9 R4.2 | length 15.4
  Top Layer w0.5: P2.3@58.674,5.318 61.214,5.318 62.367,4.165 65.141,4.165 66.294,5.318 R4.2
NetP5_1: P5.1 R8.1 | length 3.1
  Top Layer w0.5: R8.1 P5.1
RST: C13.2 P2.10 R5.1 SW1.3 SW1.4 U1.4 | length 101.9
  Top Layer w0.2: v1(66.472,24.816) 66.472,24.748 66.599,24.621 66.599,13.259 66.599,7.866 P2.10
  Top Layer w0.5: SW1.4 13.756,50.89 18.52,46.126 54.407,46.126 64.643,35.89 v1(64.643,32.674) 65.167,32.15 68.975,32.15 69.425,31.7 69.425,30.882 C13.2 U1.4
  Bottom Layer w0.2: v1(64.643,32.674) 64.643,29.465 66.472,27.636 v1(66.472,24.816)
SCK: P1.3 U1.19 | length 36
  Top Layer w0.2: v1(76.124,31.725) 77.215,31.725 79.647,29.293 81.412,29.293 U1.19
  Bottom Layer w0.3: P1.3@57.861,53.873 57.861,50.14 76.095,31.906 76.095,31.753 v1(76.124,31.725)
SDA: P1.2 U1.20 | length 34
  Top Layer w0.2: v1(76.276,32.664) 77.022,32.664 79.611,30.076 81.429,30.076 U1.20
  Bottom Layer w0.3: P1.2@60.401,53.873 60.401,48.539 v1(76.276,32.664)
SERVO: P4.1 U1.6 | length 54.3
  Top Layer w0.2: v1(71.323,27.797) 71.323,28.837 71.75,29.264 U1.6
  Bottom Layer w0.5: P4.1 32.715,50.775 44.552,38.938 60.182,38.938 v1(71.323,27.797)
SPI_CLK: R11.1 U1.11 U3.5 | length 27
  Top Layer w0.2: v1(75.971,28.203) 75.994,28.181 75.994,26.261 U1.11 ; v1(81.331,43.409) 81.788,43.409 82.94,44.561 87.618,44.561 88.153,44.026 R11.1
  Bottom Layer w0.2: v1(75.971,28.203) 75.971,30.328 76.804,31.161 76.804,35.453 81.331,39.98 v1(81.331,43.409)
SS-Enable: P3.1 U1.14 | length 18.8
  Top Layer w0.5: P3.1 78.416,10.03 U1.14
SWDCLK: P2.4 U1.24 | length 35.7
  Top Layer w0.2: v1(80.086,33.289) 80.098,33.277 81.428,33.277 U1.24
  Bottom Layer w0.2: P2.4@58.674,7.858 80.086,29.27 v1(80.086,33.289)
SWDIO: P2.2 U1.23 | length 37
  Top Layer w0.2: v1(79.549,32.382) 79.552,32.385 v1@79.728,32.385 ; v1@79.729,32.385 80.449,32.385 80.451,32.387 81.364,32.387 U1.23
  Bottom Layer w0.2: P2.2 57.971,9.398 59.563,9.398 79.549,29.384 v1(79.549,32.382)
USBD_N: D1.1 U1.21 | length 6.1
  Top Layer w0.2: U1.21 86.513,30.864 87.036,30.341 D1.1
USBD_P: D1.6 U1.22 | length 6.1
  Top Layer w0.2: U1.22 86.658,31.664 87.036,32.041 D1.6
USBDI_N: D1.3 J1.A7 J1.B7 | length 7.9
  Top Layer w0.2: D1.3 90.442,30.041 90.698,30.297 J1.B7 94.301,30.344 94.955,30.344 95.132,30.521 95.132,31.073 94.955,31.25 94.301,31.25 J1.A7
USBDI_P: D1.4 J1.A6 J1.B6 | length 8
  Top Layer w0.2: D1.4 90.087,32.341 90.631,31.797 J1.B6 94.207,31.75 93.553,31.75 93.376,31.573 93.376,31.021 93.553,30.844 94.207,30.844 J1.A6
V_USB: C14.2 D1.5 J1.A4-B9 U1.18 | length 23.7
  Top Layer w0.5: U1.18 81.46,28.445 82.206,28.445 82.234,28.417 82.428,28.417 83.007,27.838 90.76,27.838 91.796,27.838 92.557,28.6 94.207,28.6 J1.A4-B9 ; D1.5 v1(87.986,33.858) C14.2
  Bottom Layer w0.5: v1(87.986,33.858) 90.76,31.084 v1(90.76,27.835)
pads on no net: J1. J1.1 J1.2 J1.3 J1.4 J1.A8 J1.B4-A9 J1.B8 P2.6 P2.7 P2.8 U1.2 U1.3 U1.7 U1.8 U1.9 U1.10 U1.25 U1.28 U1.29 U1.30 U3.8

## Polygon pours and split planes (outlines as drawn)
GND on Top Layer "GND_L01_P004" (solid, pour order 4): 1.8,0 1.8,61 102.525,61 102.525,0
GND on Bottom Layer "GND_L02_P005" (solid, pour order 5): 1.8,0 1.8,61 102.525,61 102.525,0

## Keep-outs
Keep-Out Layer:
  rectangle: 2.007,0.102 24.511,37.719
  lines w0.254: 1.8,0 102.525,0 102.525,61 1.8,61 1.8,0

## Silkscreen, mask and mechanical layers (free items; w line width, h text height)
Bottom Overlay:
  text "Toaster Reflow Control V1.1" at 6.354,42.954 h1.52
Mechanical 1:
  lines w0.254: 1.8,0 1.8,0 ; 1.8,0 1.8,61 102.525,61 102.525,0 1.8,0